# Altium PCB SOMM.PcbDoc
Units mm, origin at the board's own origin, x right, y up, seen from the top; angles counter-clockwise.
Board outline 11.94 x 6.35 mm, 2 copper layers (Top Layer, Bottom Layer); 3 components, 0 nets, 26 pads, 4 vias.
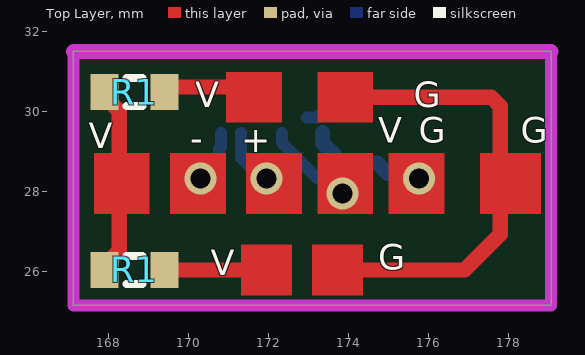
[diagram p0: Top Layer view]
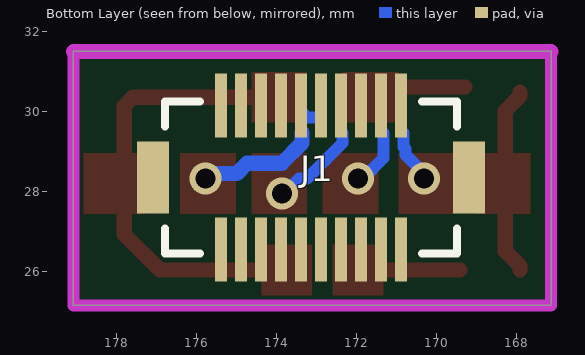
[diagram p1: Bottom Layer view, seen from below]

## Layer stack, top to bottom
Top Solder: solder mask 0.0102, Solder Resist, Dk 3.5
Top Layer: signal copper 0.0356
Dielectric 1: dielectric 0.32, FR-4, Dk 4.8
Bottom Layer: signal copper 0.0356
Bottom Solder: solder mask 0.0102, Solder Resist, Dk 3.5

## Board outline
167.132,25.146 167.132,31.496 179.07,31.496 179.07,25.146

## Design rules (kind name [scope] priority, off if disabled: settings)
Clearance [All] p1: gap=0.254 ignorepadtopadclearanceinfootprint=FALSE except(0: Arc-Hole Track-Hole SMDPad-Hole THPad-Hole Via-Hole Fill-Hole Poly-Hole Region-Hole Text-Hole)
PolygonConnect [All] p1: connectstyle=Relief reliefconductorwidth=0.254 reliefentries=4 polygonreliefangle="90 Angle" airgapwidth=0.254
RoutingVias [All] p1: holewidth=0.711 width=1.27 viastyle="Through Hole" minholewidth=0.711 minwidth=1.27 maxholewidth=0.711 maxwidth=1.27
SolderMaskExpansion [All] p1: expansion=0.102 istentingtop=FALSE
Width [All] p1: maxlimit=0.254 minlimit=0.254 preferedwidth=0.254
30 further rules are at their usual default settings.

## Components (designator, comment, footprint, x,y, rotation, side; value= is the part's Value field where it differs from the comment)
J1 "DF12B-20DS-0.5V(86)" FP-DF12B-20DS-0_5V_86-MFG 173.129,28.343 r0 bottom
R1 "Res3" J1-0603 168.656,30.48 r180 top value=10
R1 "Res3" J1-0603 168.656,26.035 r180 top value=10

## Footprints (in the part's own frame and the unit in brackets; to place one, negate y for a bottom-side part, rotate by r counter-clockwise, add the part's x,y. Pads: shape width x height; smd on the part's side, far side on the other; paste and mask are expansions set on the pad)
FP-DF12B-20DS-0_5V_86-MFG [mm]
  rect 0.3x1.6 smd paste-1000 mask+0: 1(-2.25,1.8) 2(-2.25,-1.8) 3(-1.75,1.8) 4(-1.75,-1.8) 5(-1.25,1.8) 6(-1.25,-1.8) 7(-0.75,1.8) 8(-0.75,-1.8) 9(-0.25,1.8) 10(-0.25,-1.8) 11(0.25,1.8) 12(0.25,-1.8) 13(0.75,1.8) 14(0.75,-1.8) 15(1.25,1.8) 16(1.25,-1.8) 17(1.75,1.8) 18(1.75,-1.8) 19(2.25,1.8) 20(2.25,-1.8)
  rect 0.8x1.8 smd paste+0 mask+0: 21(-3.95,0) 22(3.95,0)
  silkscreen extent -3.65,-1.9 3.65,1.9, body extent -4.05,-2.3 4.05,2.3, height 2.9
J1-0603 [mm] "Chip Resistor, Body 1.6x0.8mm, IPC High Density"
  rect 0.7x0.9 smd: 1(-0.75,0) 2(0.75,0)
  silkscreen extent -0.2,-0.35 0.2,0.35, body extent -0.85,-0.48 0.85,0.48, height 0.9

## Part data
J1: library part CMP-11605-000044-1, "CONN RCPT 20POS SMD GOLD", Contact Resistance=50mR, Current Rating=300mA, Housing Color=Beige, Max Operating Temperature=125°C, Max Voltage Rating (AC)=50V, Min Operating Temperature=-45°C, Package Quantity=1000, Connector Type=Receptacle, Contact Material=Copper, Contact Plating=Gold, Depth=3.6mm, Housing Material=Polyamide, Lead Free="Lead Free", Length=8mm, Mated Stacking Heights=5mm, Max Current Rating=300mA, Mount="Surface Mount", Number of Contacts=20, Number of Positions=20, Number of Rows=2, Orientation=Straight, Packaging="Tape and Reel", Pitch=0.5mm, Radiation Hardening=No, Stack Height=5mm, Termination=Solder, Voltage Rating=50V
R1 R1: "Resistor", LatestRevisionDate=29-May-2009, LatestRevisionNote="IPC-7351 Footprint Added.", PackageDescription="Chip Resistor", PackageReference=J1-0603, Published=8-Jun-2000, Publisher="Altium Limited"

## Via types
v1: diameter 0.8, hole 0.5, Top Layer to Bottom Layer, 4 vias

## Nets (pads, with @x,y where several pads share a name; then routed paths per layer and width w, separated by ;. In a path a pad name is that pad's centre, name@x,y a point inside that pad or via, vN(x,y) a via of type N, cw(c..) or ccw(c..) an arc to the next point about the centre after c; other vN are vias at no path point)
pads on no net: J1.1 J1.2 J1.3 J1.4 J1.5 J1.6 J1.7 J1.8 J1.9 J1.10 J1.11 J1.12 J1.13 J1.14 J1.15 J1.16 J1.17 J1.18 J1.19 J1.20 J1.21 J1.22 R1.1 R1.2
copper on no net: | length 29
  Top Layer w0.381: 167.906,26.035 167.906,26.135 168.275,26.504 168.275,28.194 168.275,30.011 167.906,30.38 167.906,30.48 ; 169.279,30.607 171.069,30.607 171.323,30.353 171.704,30.353 ; 169.406,26.035 171.45,26.035 171.704,26.289 ; 173.863,26.035 176.911,26.035 177.8,26.924 177.8,28.448 177.8,30.13 177.577,30.353 174.489,30.353
  Bottom Layer w0.3: v1(170.307,28.321) 170.307,28.456 170.769,28.918 170.769,29.058 170.815,29.104 170.815,29.464 ; 171.323,29.464 171.323,28.829 171.831,28.321 v1(171.958,28.321) ; 172.339,29.464 172.339,29.21 172.775,28.774 173.029,28.52 173.233,28.316 173.437,28.316 173.813,27.94 v1(173.863,27.94) ; 172.974,29.845 173.228,29.845 173.355,29.972
  Bottom Layer w0.381: 173.355,29.464 173.355,29.21 173.863,28.702 174.733,28.702 174.987,28.448 v1@175.641,28.448
  other v1: 175.768,28.321

## Keep-outs
Keep-Out Layer:
  the board outline again, w0.381

## Other copper
Top Layer:
  rectangle: 177.292,27.432 178.816,28.956
  rectangle: 173.228,27.432 174.625,28.956
  rectangle: 171.45,27.432 172.847,28.956
  rectangle: 175.006,27.432 176.403,28.956
  rectangle: 169.545,27.432 170.942,28.956
  rectangle: 173.228,29.718 174.625,30.988
  rectangle: 170.942,29.718 172.339,30.988
  rectangle: 173.101,25.4 174.371,26.67
  rectangle: 171.323,25.4 172.593,26.67
  rectangle: 167.64,27.432 169.037,28.956

## Silkscreen, mask and mechanical layers (free items; w line width, h text height)
Top Overlay:
  text "V" at 170.18,30.099 h0.64
  text "G" at 175.641,30.099 h0.64
  text "V" at 174.752,29.21 h0.64
  text "G" at 175.768,29.21 h0.64
  text "G" at 178.308,29.21 h0.64
  text "V" at 167.513,29.083 h0.64
  text "-" at 170.053,29.02 h0.64
  text "+" at 171.323,28.977 h0.64
  text "G" at 174.752,26.035 h0.64
  text "V" at 170.561,25.908 h0.64
Top Paste:
  rectangle: 167.513,27.432 169.037,28.956
  rectangle: 170.942,29.718 172.339,30.988
  rectangle: 173.228,29.718 174.625,30.988
  rectangle: 177.292,27.432 178.816,28.956
  rectangle: 173.101,25.4 174.371,26.67
  rectangle: 175.006,27.432 176.403,28.956
  rectangle: 173.228,27.432 174.625,28.956
  rectangle: 171.45,27.432 172.847,28.956
  rectangle: 169.418,27.432 170.942,28.956
  rectangle: 171.323,25.4 172.593,26.67
Top Solder:
  rectangle: 167.513,27.432 169.037,28.956
  rectangle: 170.942,29.718 172.339,30.988
  rectangle: 173.228,29.718 174.625,30.988
  rectangle: 177.292,27.432 178.816,28.956
  rectangle: 173.101,25.4 174.371,26.67
  rectangle: 171.323,25.4 172.593,26.67
  rectangle: 175.006,27.432 176.403,28.956
  rectangle: 173.228,27.432 174.625,28.956
  rectangle: 171.45,27.432 172.847,28.956
  rectangle: 169.418,27.432 170.942,28.956